# Altium PCB PCB1.PcbDoc (part 1 of 2)
Units mm, origin at the board's own origin, x right, y up, seen from the top; angles counter-clockwise.
Board outline 68.58 x 53.34 mm, 4 copper layers (Top Layer 1, GND Layer, GND Layer 2, Bottom Layer 2), stack 0.602 mm thick; 89 components, 77 nets, 453 pads, 4 vias.
Unrouted connection lines stored in the file: 288.
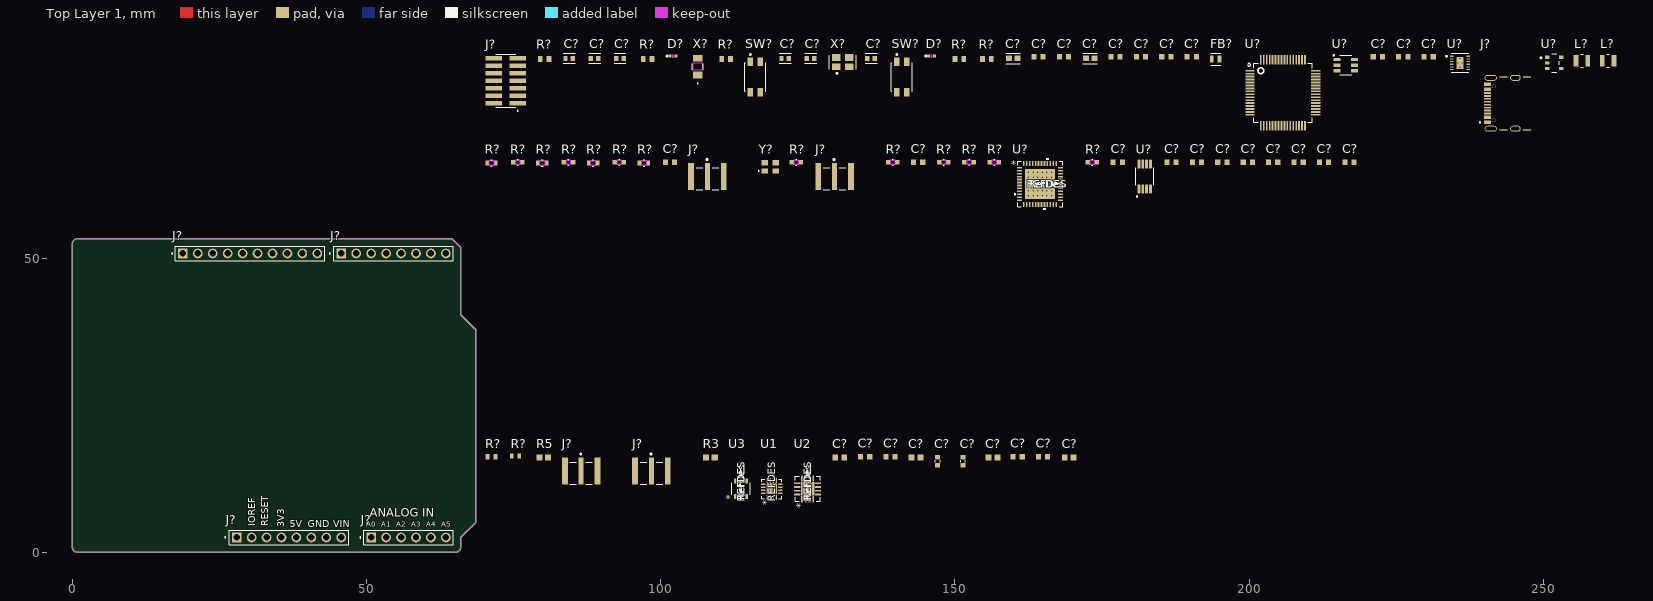
[diagram p0: Top Layer 1 view]
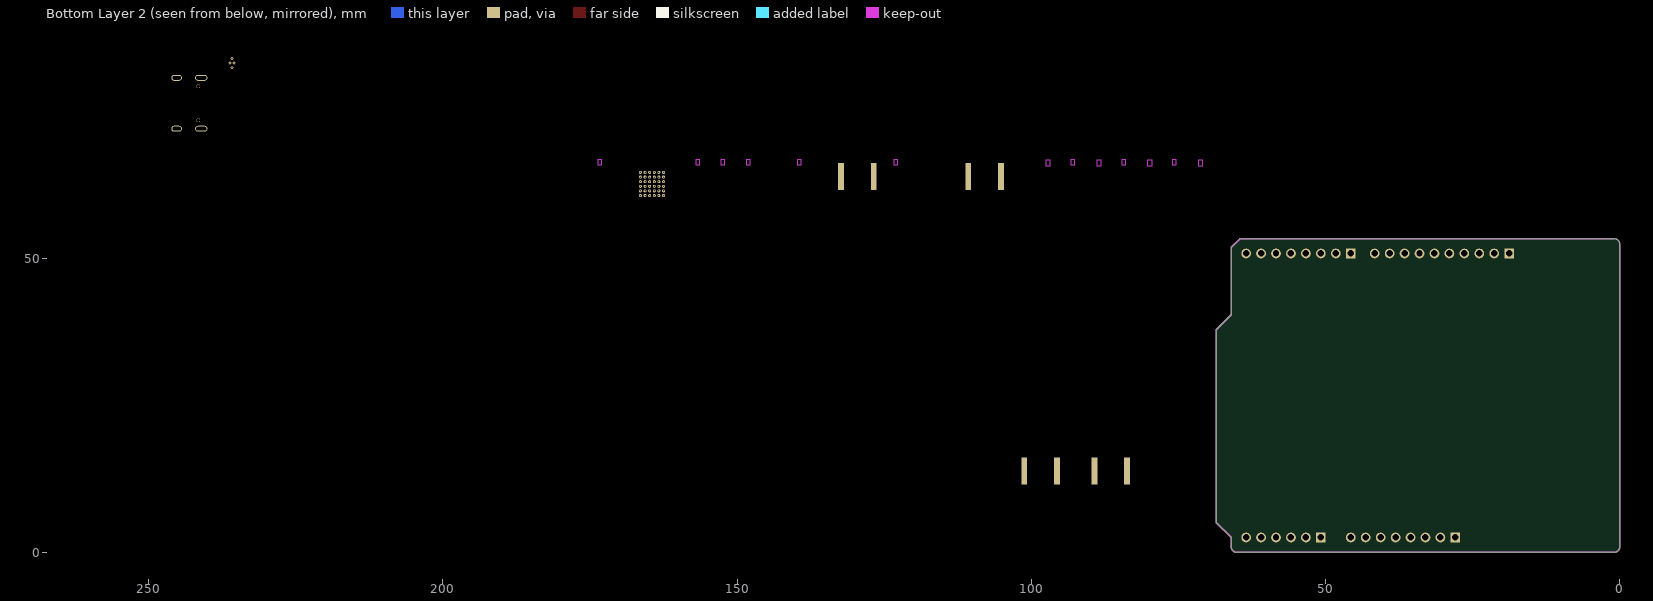
[diagram p1: Bottom Layer 2 view, seen from below]

## Layer stack, top to bottom
Top Solder: solder mask 0.0102, Solder Resist, Dk 3.5
Top Layer 1: signal copper 0.035
Dielectric 2: prepreg 0.0711, PP-006, Dk 4.1
GND Layer: signal copper 0.035
Dielectric 1: dielectric 0.32, FR-4, Dk 4.8
GND Layer 2: signal copper 0.035
Dielectric 3: prepreg 0.0711, PP-006, Dk 4.1
Bottom Layer 2: signal copper 0.035
Bottom Solder: solder mask 0.0102, Solder Resist, Dk 3.5

## Board outline
0,1 0,52.34 cw(c1,52.34) 1,53.34 64.516,53.34 66.04,51.816 66.04,40.386 68.58,37.846 68.58,5.08 66.04,2.54 66.04,1 cw(c65.04,1) 65.04,0 1,0 cw(c1,1)

## Design rules (kind name [scope] priority, off if disabled: settings)
Clearance [All] p1: gap=0.254 ignorepadtopadclearanceinfootprint=FALSE
DiffPairsRouting [All] p1: maxlimit=0.254 minlimit=0.254 mostfreqgap=0.254 toplayer_minwidth=0.381 toplayer_maxwidth=0.381 toplayer_prefwidth=0.381 midlayer1_minwidth=0.381 midlayer1_maxwidth=0.381 midlayer1_prefwidth=0.381 midlayer2_minwidth=0.381 midlayer2_maxwidth=0.381 midlayer2_prefwidth=0.381 bottomlayer_minwidth=0.381 bottomlayer_maxwidth=0.381 bottomlayer_prefwidth=0.381 maxuncoupledlength=12.7
PolygonConnect [All] p1: connectstyle=Relief reliefconductorwidth=0.254 reliefentries=4 polygonreliefangle="90 Angle" airgapwidth=0.254
RoutingVias [All] p1: holewidth=0.711 width=1.27 viastyle="Through Hole" minholewidth=0.711 minwidth=1.27 maxholewidth=0.711 maxwidth=1.27
SolderMaskExpansion [All] p1: expansion=0.102 istentingtop=FALSE
SupplyNets "Schematic Supply Nets_12" [InNet('V-')] p1: voltage=0.000
SupplyNets "Schematic Supply Nets_11" [InNet('V+')] p2: voltage=0.000
SupplyNets "Schematic Supply Nets_10" [InNet('VDD_MCU')] p3: voltage=0.000
SupplyNets "Schematic Supply Nets_9" [InNet('3V3')] p4: voltage=0.000
SupplyNets "Schematic Supply Nets_8" [InNet('VUSB_IN')] p5: voltage=0.000
SupplyNets "Schematic Supply Nets_7" [InNet('VCCI')] p6: voltage=0.000
SupplyNets "Schematic Supply Nets_6" [InNet('VUSB')] p7: voltage=0.000
SupplyNets "Schematic Supply Nets" [InNet('3.3V')] p8: voltage=0.000
SupplyNets "Schematic Supply Nets_5" [InNet('VPWR_PWM')] p9: voltage=0.000
SupplyNets "Schematic Supply Nets_4" [InNet('MODE')] p10: voltage=0.000
Width [All] p1: maxlimit=0.254 minlimit=0.254 preferedwidth=0.254
29 further rules are at their usual default settings.

## Classes and differential pairs
net class ADC_D[0..15]: ADC_D0 ADC_D1 ADC_D2 ADC_D3 ADC_D4 ADC_D5 ADC_D6 ADC_D7 ADC_D8 ADC_D9 ADC_D10 ADC_D11 ADC_D12 ADC_D13 ADC_D14 ADC_D15
component class "Power & MCU": C? D? F? FB? J? L? R? SW? U? X?
component class Connectors: J?
component class Heating: C? J? R? U? Y?
component class Conditioning: C? J? R3 R4 R5 R? U1 U2 U3
differential pair USB: +USB_P -USB_N
differential pair USB_D: +USB_D_P -USB_D_N

## Components (designator, comment, footprint, x,y, rotation, side; value= is the part's Value field where it differs from the comment)
C? "CL10B104KB8NNWC" ANTC1608X90N 101.6,66.294 r0 top value=100nF
C? "CL10B104KB8NNWC" ANTC1608X90N 217.043,66.294 r0 top value=100nF
C? "CL10B104KB8NNWC" ANTC1608X90N 191.135,66.294 r0 top value=100nF
C? "CL10B104KB8NNWC" ANTC1608X90N 134.747,16.256 r0 top value=100nF
C? "CL10B104KB8NNWC" ANTC1608X90N 204.089,66.294 r0 top value=100nF
C? "CL10B104KB8NNWC" ANTC1608X90N 212.725,66.294 r0 top value=100nF
C? "CL10B104KB8NNWC" ANTC1608X90N 195.453,66.294 r0 top value=100nF
C? "CL10B104KB8NNWC" ANTC1608X90N 143.764,66.294 r0 top value=100nF
C? "CL10B104KB8NNWC" ANTC1608X90N 208.407,66.294 r0 top value=100nF
C? "CL10B104KB8NNWC" ANTC1608X90N 177.673,66.294 r0 top value=100nF
C? "CL10B104KB8NNWC" ANTC1608X90N 186.817,66.294 r0 top value=100nF
C? "GRM188Z71A106KA73J" CAPC1608X100N 156.464,16.129 r0 top value=10uF
C? "CL10B104KB8NNWC" ANTC1608X90N 139.065,16.256 r0 top value=100nF
C? "CL10B104KB8NNWC" ANTC1608X90N 164.973,16.256 r0 top value=100nF
C? "CL10B102KB8NNNC" CAPC1608X90N 151.384,15.494 r0 top value=1nF
C? "GRM188Z71A106KA73J" CAPC1608X100N 143.383,16.129 r0 top value=10uF
C? "CL10B104KB8NNWC" ANTC1608X90N 160.655,16.256 r0 top value=100nF
C? "GRM188Z71A106KA73J" CAPC1608X100N 169.418,16.129 r0 top value=10uF
C? "CL10B102KB8NNNC" CAPC1608X90N 147.066,15.494 r0 top value=1nF
C? "GRM188Z71A106KA73J" CAPC1608X100N 130.429,16.129 r0 top value=10uF
C? "CL10B104KB8NNWC" ANTC1608X90N 168.529,84.201 r0 top value=100nF
C? "CL10A105KA8NNNC" ANTC1608X90N 230.505,84.201 r0 top value=1uF
C? "CL10B104KB8NNWC" ANTC1608X90N 185.928,84.201 r0 top value=100nF
C? "CL10B104KB8NNWC" ANTC1608X90N 181.61,84.201 r0 top value=100nF
C? "GCM1885C2A100JA16D" C0603-V2 121.158,83.947 r0 top value=10pF
C? "GCM1885C2A100JA16D" C0603-V2 125.476,83.947 r0 top value=10pF
C? "CL10B104KB8NNWC" ANTC1608X90N 177.292,84.201 r0 top value=100nF
C? "C0603C475K9PACTU" FP-C0603-CG-IPC_B 159.893,83.947 r0 top value=4.7uF
C? "0603N5R0B101CT" C0603-V2 84.455,83.947 r0 top value=5pF
C? "CL10B104KB8NNWC" ANTC1608X90N 221.869,84.201 r0 top value=100nF
C? "C0603C475K9PACTU" FP-C0603-CG-IPC_B 172.974,83.947 r0 top value=4.7uF
C? "0603N5R0B101CT" C0603-V2 88.773,83.947 r0 top value=5pF
C? "CL10B104KB8NNWC" ANTC1608X90N 199.771,66.294 r0 top value=100nF
C? "CL10E104KC8VPNC" C0603-V2 135.763,83.947 r0 top value=100nF
C? "CL10A105KA8NNNC" ANTC1608X90N 226.187,84.201 r0 top value=1uF
C? "CL10E104KC8VPNC" C0603-V2 93.091,83.947 r0 top value=100nF
C? "CL10B104KB8NNWC" ANTC1608X90N 190.246,84.201 r0 top value=100nF
C? "CL10A105KA8NNNC" ANTC1608X90N 164.211,84.201 r0 top value=1uF
D? "D5V0L1B2S9-7" SOD923_DIO 102.108,84.328 r0 top
D? "D5V0L1B2S9-7" SOD923_DIO 146.05,84.328 r0 top
FB? "BLM18SG700TN1D" BLM18SG700TN1D-MFG 194.31,83.82 r0 top
J? "10129378-908002BLF" AMPHENOL_10129378-908002BLF 54.61,50.8 r0 top
J? "10129378-910002BLF" AMPHENOL_10129378-910002BLF 30.226,50.8 r0 top
J? "10129378-908002BLF" AMPHENOL_10129378-908002BLF 36.83,2.54 r0 top
J? "EMPCB.SMAFSTJ.B.HT" "SMA Connector" 86.487,13.843 r0 top
J? "EMPCB.SMAFSTJ.B.HT" "SMA Connector" 98.425,13.843 r0 top
J? "FTSH-107-01-F-DV-K-P-TR" SAMTEC_FTSH-107-01-F-DV-K-P-TR 73.66,80.137 r90 top
J? "USB4105-GF-A" GCT_USB4105-GF-A 245.237,76.327 r90 top
J? "EMPCB.SMAFSTJ.B.HT" "SMA Connector" 107.95,63.881 r0 top
J? "54101-T06-06LF" AMPHENOL_54101-T06-06LF 57.15,2.54 r0 top
J? "EMPCB.SMAFSTJ.B.HT" "SMA Connector" 129.54,63.881 r0 top
L? "1239AS-H-4R7M=P2" FP-DFE252012C-MFG 260.985,83.566 r0 top
L? "1239AS-H-4R7M=P2" FP-DFE252012C-MFG 256.54,83.566 r0 top
R3 "RC0603FR-07100RL" RESC1607X60N 108.458,16.129 r0 top value=100
R5 "RC0603FR-07100RL" RESC1607X60N 80.137,16.129 r0 top value="100 Ohm"
R? "RC0603FR-071KL" RC0603N_YAG 156.718,66.294 r0 top value=1kR
R? "RC0605FR-07100RL" RC0603N_YAG 148.082,66.294 r0 top value=100R
R? "CRCW06033K00FKEA" RC0603N_YAG 92.964,66.294 r0 top value=3kR
R? "RC0603FR-071KL" RC0603N_YAG 152.4,66.294 r0 top value=1kR
R? "RC0603JR-070RL" RES_RC0603_YAG 97.155,66.167 r0 top value=0R
R? "RC0605FR-07100RL" RC0603N_YAG 139.446,66.294 r0 top value=100R
R? "CRCW06033K00FKEA" RC0603N_YAG 75.692,66.294 r0 top value=3kR
R? "RC0603FR-07383RL" RESC1608X55X25LL10T15 75.311,16.383 r0 top value=383
R? "RC0603JR-0720RL" RESC1608X55X25NL10T15 71.247,16.256 r0 top value=20
R? "RC0603JR-070RL" RES_RC0603_YAG 79.883,66.167 r0 top value=0R
R? "RC0605FR-07100RL" RC0603N_YAG 123.063,66.294 r0 top value=100R
R? "RC0603FR-071KL" RC0603N_YAG 173.355,66.294 r0 top value=1kR
R? "RT0603BRE075KL" R0603 155.448,83.82 r0 top value=5kR
R? "RC0603FR-07100KL" R0603 80.264,83.82 r0 top value=100kR
R? "RC0603FR-0710KL" R0603 111.125,83.82 r0 top value=10kR
R? "RC0603FR-0710KL" R0603 150.749,83.82 r0 top value=10kR
R? "RC0603JR-070RL" RES_RC0603_YAG 71.247,66.167 r0 top value=0R
R? "CRCW06032K00FKEAHP" RC0603N_YAG 84.328,66.294 r0 top value=2kR
R? "RC0603JR-070RL" RES_RC0603_YAG 88.519,66.167 r0 top value=0R
R? "RT0603BRE075KL" R0603 97.79,83.82 r0 top value=5kR
SW? "BOOT" FP-EVQ-P2402W-MFG 116.078,80.772 r90 top
SW? "RST" FP-EVQ-P2402W-MFG 140.97,80.772 r90 top
U1 "LTC6560HUDPBF" QFN16_UD_ADI 118.872,10.795 r90 top
U2 "AD8336ACPZ-RL" CP_16_4_ADI 124.968,10.795 r90 top
U3 "LT6233CS6-10#TRMPBF" TSOT-23_S6_LIT 113.665,10.795 r90 top
U? "ESDALCL6-2SC6" ESDALCL6-2SC6 216.408,82.804 r0 top
U? "ADS5560IRGZT" RGZ48_5P15X5P15 164.465,62.611 r0 top
U? "MCP6N16T-010E/MS" SOP65P490X110-8N 182.245,63.881 r90 top
U? "AP2112K-3.3TRG1" FP-SOT25-MFG 251.841,83.185 r0 top
U? "STM32F401RBT6" QFP50P1200X1200X160-64N 205.74,78.105 r0 top
U? "TPS65133DPDR" FP-DPD0012A-MFG 235.839,83.185 r0 top
X? "SC32S-7PF20PPM" XTAL_SC32S-7PF20PPM_EPS 106.299,82.55 r90 top value=32.768kHz
X? "TSX-3225 16.0000MF18X-AC0" FP-TSX-3225-MFG 130.937,83.312 r0 top value=16MHz
Y? "ECS-2033-400-BN" OSC_ECS-2033-400-BN 118.618,65.532 r0 top value=40MHz

## Footprints (in the part's own frame and the unit in brackets; to place one, negate y for a bottom-side part, rotate by r counter-clockwise, add the part's x,y. Pads: shape width x height; smd on the part's side, far side on the other; paste and mask are expansions set on the pad)
AMPHENOL_54101-T06-06LF [mm]
  rect 1.65x1.65 hole 1.1: A1(-6.35,0)
  round 1.65 hole 1.1: A2(-3.81,0) A3(-1.27,0) A4(1.27,0) A5(3.81,0) A6(6.35,0)
  silkscreen extent -8.27,-1.2 7.62,1.2, body extent -7.62,-1.2 7.62,1.2, height 8.39
AMPHENOL_10129378-908002BLF [mm]
  rect 1.65x1.65 / inner round 1.65 / far side rect 1.65x1.65 hole 1.1: 1(-8.89,0)
  round 1.65 hole 1.1: 2(-6.35,0) 3(-3.81,0) 4(-1.27,0) 5(1.27,0) 6(3.81,0) 7(6.35,0) 8(8.89,0)
  silkscreen extent -10.92,-1.22 10.16,1.19, body extent -2.49,-1.2 8.18,1.2, height 1.27
AMPHENOL_10129378-910002BLF [mm]
  rect 1.65x1.65 / inner round 1.65 / far side rect 1.65x1.65 hole 1.1: 1(-11.43,0)
  round 1.65 hole 1.1: 2(-8.89,0) 3(-6.35,0) 4(-3.81,0) 5(-1.27,0) 6(1.27,0) 7(3.81,0) 8(6.35,0) 9(8.89,0) 10(11.43,0)
  silkscreen extent -13.35,-1.2 12.7,1.2, body extent -2.49,-1.2 8.18,1.2, height 1.27
ANTC1608X90N [mm]
  rect 0.87x0.93 smd: 1(-0.78,0) 2(0.78,0)
  body extent -0.8,-0.4 0.8,0.4, height 0.45
BLM18SG700TN1D-MFG [mm]
  rect 0.65x1.2 smd paste-1000 mask-1000: 1(-0.675,0) 2(0.675,0)
  silkscreen extent -0.87,-1 0.87,1, body extent -1.1,-0.7 1.1,0.7, height 0.25
C0603-V2 [mm]
  rect 0.758x0.812 smd paste+0 mask+0: 1(-0.627,0) 2(0.627,0)
  silkscreen extent -1.01,-0.85 1.01,0.85, body extent -1.11,-0.55 1.11,0.55, height 0.25
CAPC1608X90N [mil] "Chip Resistor, Body 1.6x0.8mm, Height 0.9mm"
  rrect20% 34x30 smd: 1(0,28) 2(0,-28)
  silkscreen extent -16,-6 16,6, body extent -16,-30 16,30, height 36
CAPC1608X100N [mm]
  rect 1x1.02 smd: 1(-0.759,0) 2(0.759,0)
  body extent -0.8,-0.4 0.8,0.4, height 1
CP_16_4_ADI [mil]
  rect 42x12 smd paste+0 mask+0: 1(-69.5,38.39) 2(-69.5,12.8) 3(-69.5,-12.8) 4(-69.5,-38.39) 9(69.5,-38.39) 10(69.5,-12.8) 11(69.5,12.8) 12(69.5,38.39)
  rect 12x42 smd paste+0 mask+0: 5(-38.39,-69.5) 6(-12.8,-69.5) 7(12.8,-69.5) 8(38.39,-69.5) 13(38.39,69.5) 14(12.8,69.5) 15(-12.8,69.5) 16(-38.39,69.5)
  rect 89x89 smd paste+0 mask+0: 17(0,0)
  silkscreen extent -84,-84 110,84, body extent -79,-79 79,79, height 39
ESDALCL6-2SC6 [mil]
  rect 46.5x22 smd paste+0 mask+0: 1(-57.75,37.4) 2(-57.75,0) 3(-57.75,-37.4) 4(57.75,-37.4) 5(57.75,0) 6(57.75,37.4)
  silkscreen extent -84,-65 40,69, body extent -59,-60 59,60, height 57
FP-C0603-CG-IPC_B [mm]
  rect 1.007x0.958 smd paste+0 mask+0: 1(-0.726,0) 2(0.726,0)
  silkscreen extent -1.23,-0.88 1.23,0.88, body extent -1.48,-0.73 1.48,0.73, height 0.25
FP-DFE252012C-MFG [mm]
  rect 0.8x2 smd paste+0 mask+0: 1(-1,0) 2(1,0)
  silkscreen extent -0.23,-1.1 0.23,1.1, body extent -1.5,-1.2 1.5,1.2, height 0.25
FP-DPD0012A-MFG [mm]
  rrect100% 0.6x0.2 smd paste+0 mask+0: 1(-1.4,1.125) 2(-1.4,0.675) 3(-1.4,0.225) 4(-1.4,-0.225) 5(-1.4,-0.675) 6(-1.4,-1.125) 7(1.4,-1.125) 8(1.4,-0.675) 9(1.4,-0.225) 10(1.4,0.225) 11(1.4,0.675) 12(1.4,1.125)
  rect 1.21x2.02 smd paste-1000 mask+0: 13(0,0)
  silkscreen extent -2.4,-1.6 1.5,1.6, body extent -1.8,-1.65 1.8,1.65, height 0.25
FP-EVQ-P2402W-MFG [mm]
  rect 1.45x1 smd paste+0 mask+0: 1(2.575,0.85) 2(2.575,-0.85) 3(-2.575,0.85) 4(-2.575,-0.85)
  silkscreen extent -2.4,-1.8 3.97,1.8, body extent -3.4,-1.9 3.4,1.9, height 0.25
FP-SOT25-MFG [mm]
  rect 0.8x0.55 smd paste+0 mask+0: 1(-1.2,0.95) 2(-1.2,0) 3(-1.2,-0.95) 4(1.2,-0.95) 5(1.2,0.95)
  silkscreen extent -2.37,-1.55 0.85,1.55, body extent -1.7,-1.65 1.7,1.65, height 0.25
FP-TSX-3225-MFG [mm]
  rect 1.4x1.15 smd paste+0 mask+0: 1(-1.1,-0.8) 2(1.1,-0.8) 3(1.1,0.8) 4(-1.1,0.8)
  silkscreen extent -2.3,-2.02 2.3,1.2, body extent -1.9,-1.48 1.9,1.48, height 0.25
GCT_USB4105-GF-A [mm]
  rect 0.6x1.15 smd mask+0.05: A1_B12(-3.2,4.755) A4_B9(-2.4,4.755) B1_A12(3.2,4.755) B4_A9(2.4,4.755)
  rect 0.3x1.15 smd mask+0.05: A5(-1.25,4.755) A6(-0.25,4.755) A7(0.25,4.755) A8(1.25,4.755) B5(1.75,4.755) B6(0.75,4.755) B7(-0.75,4.755) B8(-1.75,4.755)
  oval 1x2.1 hole 0.6 slot 1.7 at 90 deg: SH1(-4.32,4.18) SH2(4.32,4.18)
  oval 1x1.8 hole 0.6 slot 1.4 at 90 deg: SH3(-4.32,0) SH4(4.32,0)
  round 0.65 hole 0.65 unplated: ""(-2.89,3.68) ""(2.89,3.68)
  silkscreen extent -4.47,-2.6 4.47,6.1, body extent -4.47,-2.6 4.47,5.11, height 3.31
OSC_ECS-2033-400-BN [mm]
  rect 1.1x0.9 smd: 1(-0.9,-0.7) 2(0.9,-0.7) 3(0.9,0.7) 4(-0.9,0.7)
  silkscreen extent -2.08,-0.8 -1.88,-0.6, body extent -1.25,-1 1.25,1, height 1
QFN16_UD_ADI [mil]
  rect 32x10 smd paste+0 mask+0: 1(-57,29.53) 2(-57,9.84) 3(-57,-9.84) 4(-57,-29.53) 9(57,-29.53) 10(57,-9.84) 11(57,9.84) 12(57,29.53)
  rect 10x32 smd paste+0 mask+0: 5(-29.53,-57) 6(-9.84,-57) 7(9.84,-57) 8(29.53,-57) 13(29.53,57) 14(9.84,57) 15(-9.84,57) 16(-29.53,57)
  rect 69x69 smd paste+0 mask+0: 17(0,0)
  silkscreen extent -66,-66 93,66, body extent -61,-61 61,61, height 32
QFP50P1200X1200X160-64N [mm]
  rect 1.6x0.3 smd: 1(-5.6,3.75) 2(-5.6,3.25) 3(-5.6,2.75) 4(-5.6,2.25) 5(-5.6,1.75) 6(-5.6,1.25) 7(-5.6,0.75) 8(-5.6,0.25) 9(-5.6,-0.25) 10(-5.6,-0.75) 11(-5.6,-1.25) 12(-5.6,-1.75) 13(-5.6,-2.25) 14(-5.6,-2.75) 15(-5.6,-3.25) 16(-5.6,-3.75) 33(5.6,-3.75) 34(5.6,-3.25) 35(5.6,-2.75) 36(5.6,-2.25) 37(5.6,-1.75) 38(5.6,-1.25) 39(5.6,-0.75) 40(5.6,-0.25) 41(5.6,0.25) 42(5.6,0.75) 43(5.6,1.25) 44(5.6,1.75) 45(5.6,2.25) 46(5.6,2.75) 47(5.6,3.25) 48(5.6,3.75)
  rect 0.3x1.6 smd: 17(-3.75,-5.6) 18(-3.25,-5.6) 19(-2.75,-5.6) 20(-2.25,-5.6) 21(-1.75,-5.6) 22(-1.25,-5.6) 23(-0.75,-5.6) 24(-0.25,-5.6) 25(0.25,-5.6) 26(0.75,-5.6) 27(1.25,-5.6) 28(1.75,-5.6) 29(2.25,-5.6) 30(2.75,-5.6) 31(3.25,-5.6) 32(3.75,-5.6) 49(3.75,5.6) 50(3.25,5.6) 51(2.75,5.6) 52(2.25,5.6) 53(1.75,5.6) 54(1.25,5.6) 55(0.75,5.6) 56(0.25,5.6) 57(-0.25,5.6) 58(-0.75,5.6) 59(-1.25,5.6) 60(-1.75,5.6) 61(-2.25,5.6) 62(-2.75,5.6) 63(-3.25,5.6) 64(-3.75,5.6)
  silkscreen extent -6,-5 5,5, body extent -6,-6 6,6, height 1.6
R0603 [mm] "Chip Resistor, 2-Leads, Body 1.60x0.80mm, IPC Low Density"
  rect 0.8x1 smd: 1(-0.75,0) 2(0.75,0)
  body extent -0.85,-0.45 0.85,0.45, height 0.55
RC0603N_YAG [mil]
  rect 30x32 smd paste+0 mask+0: 1(-30.5,0) 2(30.5,0)
  Top Layer 1 keep-out region: -13.5,-14 -13.5,14 13.5,14 13.5,-14
  Keep-Out Layer region: -13.5,-16 -13.5,16 13.5,16 13.5,-16
  silkscreen extent -3,-21 3,21, body extent -31,-16 31,16, height 28
RES_RC0603_YAG [mil]
  rect 24x35 smd paste+0 mask+0: 1(-29.5,0) 2(29.5,0)
  Top Layer 1 keep-out region: -15.5,-15.5 -15.5,15.5 15.5,15.5 15.5,-15.5
  Keep-Out Layer region: -15.5,-17.5 -15.5,17.5 15.5,17.5 15.5,-17.5
  silkscreen extent -5,-22 5,22, body extent -34,-17 34,17, height 22
RESC1607X60N [mm]
  rect 1.04x1.02 smd: 1(-0.735,0) 2(0.735,0)
RESC1608X55X25LL10T15 [mm] "Chip Resistor, 2-Leads, Body 1.60x0.80mm, IPC High Density"
  rect 0.6x0.8 smd: 1(-0.65,0) 2(0.65,0)
  body extent -0.85,-0.45 0.85,0.45, height 0.55
RESC1608X55X25NL10T15 [mm] "Chip Resistor, 2-Leads, Body 1.60x0.80mm, IPC Medium Density"
  rect 0.7x0.9 smd: 1(-0.7,0) 2(0.7,0)
  body extent -0.85,-0.45 0.85,0.45, height 0.55
RGZ48_5P15X5P15 [mil]
  rect 33.46x11.02 smd paste-5.51 mask-16.5: 1(-136.81,108.27) 2(-136.81,88.58) 3(-136.81,68.9) 4(-136.81,49.21) 5(-136.81,29.53) 6(-136.81,9.84) 7(-136.81,-9.84) 8(-136.81,-29.53) 9(-136.81,-49.21) 10(-136.81,-68.9) 11(-136.81,-88.58) 12(-136.81,-108.27) 25(136.81,-108.27) 26(136.81,-88.58) 27(136.81,-68.9) 28(136.81,-49.21) 29(136.81,-29.53) 30(136.81,-9.84) 31(136.81,9.84) 32(136.81,29.53) 33(136.81,49.21) 34(136.81,68.9) 35(136.81,88.58) 36(136.81,108.27)
  rect 11.02x33.46 smd paste-5.51 mask-16.5: 13(-108.3,-136.81) 14(-88.6,-136.81) 15(-68.92,-136.81) 16(-49.23,-136.81) 17(-29.53,-136.81) 18(-9.84,-136.81) 19(9.84,-136.81) 20(29.53,-136.81) 21(49.23,-136.81) 22(68.92,-136.81) 23(88.6,-136.81) 24(108.3,-136.81) 37(108.3,136.81) 38(88.6,136.81) 39(68.92,136.81) 40(49.23,136.81) 41(29.53,136.81) 42(9.84,136.81) 43(-9.84,136.81) 44(-29.53,136.81) 45(-49.23,136.81) 46(-68.92,136.81) 47(-88.6,136.81) 48(-108.3,136.81)
  rect 202.76x202.76 smd paste-100.88 mask-101: 49(0,0)
  round 20 / inner round 60 / far side round 20 hole 10 paste-99999 mask-10: V(-77.5,-77.5) V(-77.5,-46.5) V(-77.5,-15.5) V(-77.5,15.5) V(-77.5,46.5) V(-77.5,77.5) V(-46.5,-77.5) V(-46.5,-46.5) V(-46.5,-15.5) V(-46.5,15.5) V(-46.5,46.5) V(-46.5,77.5) V(-15.5,-77.5) V(-15.5,-46.5) V(-15.5,-15.5) V(-15.5,15.5) V(-15.5,46.5) V(-15.5,77.5) V(15.5,-77.5) V(15.5,-46.5) V(15.5,-15.5) V(15.5,15.5) V(15.5,46.5) V(15.5,77.5) V(46.5,-77.5) V(46.5,-46.5) V(46.5,-15.5) V(46.5,15.5) V(46.5,46.5) V(46.5,77.5) V(77.5,-77.5) V(77.5,-46.5) V(77.5,-15.5) V(77.5,15.5) V(77.5,46.5) V(77.5,77.5)
  silkscreen extent -174,-174 174,174, body extent -143,-143 143,143, height 55
SAMTEC_FTSH-107-01-F-DV-K-P-TR [mm]
  rect 0.74x2.79 smd: 1(-3.81,-2.035) 2(-3.81,2.035) 3(-2.54,-2.035) 4(-2.54,2.035) 5(-1.27,-2.035) 6(-1.27,2.035) 7(0,-2.035) 8(0,2.035) 9(1.27,-2.035) 10(1.27,2.035) 11(2.54,-2.035) 12(2.54,2.035) 13(3.81,-2.035) 14(3.81,2.035)
  silkscreen extent -5.19,-2.13 4.53,1.72, body extent -4.44,-3.69 4.44,3.67, height 6.98
"SMA Connector" [mm] "TAOGLAS_EMPCB.SMAFSTJ.B.HT"
  rect 0.85x4.56 smd: 1(0,0)
  rect 1x4.56 smd: SH1(-2.77,0) SH2(2.77,0)
  rect 1x4.56 smd far side: SH3(-2.77,0) SH4(2.77,0)
  silkscreen extent -1.9,-2.28 1.9,2.99, body extent -3.19,-11.4 3.19,1.9, height 3.55
SOD923_DIO [mm]
  rect 0.5x0.5 smd paste+0 mask+0: 1(-0.507,0) 2(0.507,0)
  Top Layer 1 keep-out region: -0.051,-0.249 -0.051,0.249 0.051,0.249 0.051,-0.249
  silkscreen extent -1.14,-0.13 -0.89,0.13, body extent -0.5,-0.3 0.5,0.3, height 0.82
SOP65P490X110-8N [mm]
  rrect50% 1.5x0.49 smd: 1(-2.105,0.975) 2(-2.105,0.325) 3(-2.105,-0.325) 4(-2.105,-0.975) 5(2.105,-0.975) 6(2.105,-0.325) 7(2.105,0.325) 8(2.105,0.975)
  silkscreen extent -3.5,-1.53 1.5,1.53, body extent -2.45,-1.5 2.45,1.5, height 1.1
TSOT-23_S6_LIT [mil]
  rect 34.5x20 smd paste+0 mask+0: 1(-51.75,37.4) 2(-51.75,0) 3(-51.75,-37.4) 4(51.75,-37.4) 5(51.75,0) 6(51.75,37.4)
  silkscreen extent -40,-62 40,62, body extent -55,-57 55,57, height 39
XTAL_SC32S-7PF20PPM_EPS [mil]
  rect 46x63 smd paste+0 mask+0: 1(-56,0) 2(56,0)
  Top Layer 1 keep-out region: -25,-29.5 -25,29.5 25,29.5 25,-29.5
  silkscreen extent -115,-36 21,36, body extent -65,-31 65,31, height 33

## Part data
C? C? C? C? C? C? C? C? C? C? C? C? C? C? C? C? C? C? C? C? C?: "CAP CER 0.1UF 50V X7R 0603", Case Code (Imperial)=0603, Case Code (Metric)=1608, Manufacturer=Samsung, Max Operating Temperature=125°C, Min Operating Temperature=-55°C, Package Quantity=1, Tolerance=10%, Voltage Rating=50V, Case/Package=0603, Category="Ceramic Capacitors", ComponentLink1Description=https://datasheet.ciiva.com/25740/cl10b104kb8nnwc-25740227.pdf?src-supplier=Digikey, ComponentLink1URL=https://datasheet.ciiva.com/25740/cl10b104kb8nnwc-25740227.pdf?src-supplier=Digikey, Length=0.063inch, Manufacturer Part Number=CL10B104KB8NNWC, Mounting Technology="Surface Mount", Packaging="Cut Tape", Pricing="4000=0.0024 (USD)", RoHS=Yes, RoHS Compliant=Yes, Series=CL, Stock=4312000, Supplier="Arrow Electronics", Supplier Part Number=CL10B104KB8NNWC, Thickness=0.035inch, Width=0.031inch
C? C? C? C?: "CAP CER 10UF 10V X7R 0603", Capacitor Type=Ceramic, Case/Package=0603, Manufacturer=Murata, Max Operating Temperature=125°C, Min Operating Temperature=-55°C, Package Shape=Rectangular, Rated DC Voltage (URdc)=10V, Supplier Part Number=81-GRM188Z71A106KA3J, Temperature Characteristics Code=X7R, Tolerance  (fill in as +-)=10%, Category="Ceramic Capacitors", ComponentLink1Description=https://psearch.en.murata.com:443/capacitor/product/GRM188Z71A106KA73%23.pdf?src-supplier=IHS+Markit, ComponentLink1URL=https://psearch.en.murata.com:443/capacitor/product/GRM188Z71A106KA73%23.pdf?src-supplier=IHS+Markit, Dielectric Material=Ceramic, Manufacturer Part Number=GRM188Z71A106KA73J, Mounting Technology="Surface Mount", Multilayer=Yes, Packaging="Tape and Reel", Pins=2, Pricing="1=0.23, 10=0.121, 50=0.121, 100=0.073, 1000=0.056, 10000=0.041 (USD)", Reach SVHC Compliant=Yes, RoHS=Yes, RoHS Compliant=Yes, Stock=19133, Supplier=Mouser, Termination=Wraparound, Tolerance (fill in as +-)=10%
C? C?: "CAP CER 1000PF 50V X7R 0603", Case Code (Imperial)=0603, Case Code (Metric)=1608, Dielectric=X7R, Manufacturer=Samsung, Max Operating Temperature=125°C, Min Operating Temperature=-55°C, Package Quantity=1, Tolerance=10%, Voltage=50V, Case/Package=0603, Category="Ceramic Capacitors", ComponentLink1Description=https://datasheet.ciiva.com/25805/cl10b102kb8nnnc-25805137.pdf?src-supplier=Digikey, ComponentLink1URL=https://datasheet.ciiva.com/25805/cl10b102kb8nnnc-25805137.pdf?src-supplier=Digikey, ComponentLink2Description=https://datasheet.ciiva.com/15216/getdatasheetpartid-359690-15216231.pdf?src-supplier=Verical, ComponentLink2URL=https://datasheet.ciiva.com/15216/getdatasheetpartid-359690-15216231.pdf?src-supplier=Verical, ComponentLink3Description=https://datasheet.ciiva.com/29198/458300-da-01-en-vs-kondensator-0603-29198498.pdf?src-supplier=Conrad, ComponentLink3URL=https://datasheet.ciiva.com/29198/458300-da-01-en-vs-kondensator-0603-29198498.pdf?src-supplier=Conrad, ComponentLink4Description=https://datasheet.ciiva.com/26310/mlcc-catalogdownload2013-eng-26310326.pdf?src-supplier=Distrelec, ComponentLink4URL=https://datasheet.ciiva.com/26310/mlcc-catalogdownload2013-eng-26310326.pdf?src-supplier=Distrelec, ComponentLink5Description=https://datasheet.ciiva.com/16199/cl05b104kq5nnnc-16199064.pdf?src-supplier=Future+Electronics, ComponentLink5URL=https://datasheet.ciiva.com/16199/cl05b104kq5nnnc-16199064.pdf?src-supplier=Future+Electronics, Construction=Flat, Depth=0.8mm, Height=0.8mm, Lead Free="Lead Free", Length=1.6mm, Manufacturer Part Number=CL10B102KB8NNNC, Material=Ceramic, Mounting Technology="Surface Mount", Packaging="Tape and Reel", Pricing="4000=0.006, 8000=0.004, 28000=0.0039, 100000=0.0035 (USD)", Radiation Hardening=No, RoHS=Yes, RoHS Compliant=Yes, Series=CL, Stock=8676000, Supplier="Arrow Electronics", Supplier Part Number=CL10B102KB8NNNC, Thickness=0.035inch, Voltage Rating=50V, Voltage Rating (DC)=50V, Width=0.031inch
C? C? C?: "CAP CER 1UF 25V X5R 0603", Capacitor Type=Ceramic, Case/Package=0603, Manufacturer=Samsung, Max Operating Temperature=85°C, Min Operating Temperature=-55°C, Package Shape=Rectangular, Package Style=SMTMeter, Rated DC Voltage (URdc)=25V, Temperature Characteristics Code=X5R, Tolerance  (fill in as +-)=10%, Category="Ceramic Capacitors", ComponentLink1Description=https://datasheet.ciiva.com:443/pdfs/VipMasterIC/IC/SEMS/SEMS-S-A0008520814/SEMS-S-A0008520762-1.pdf?src-supplier=IHS+Markit, ComponentLink1URL=https://datasheet.ciiva.com:443/pdfs/VipMasterIC/IC/SEMS/SEMS-S-A0008520814/SEMS-S-A0008520762-1.pdf?src-supplier=IHS+Markit, ComponentLink2Description=https://datasheet.ciiva.com/25801/cl10a105ka8nnnc-25801364.pdf?src-supplier=Digikey, ComponentLink2URL=https://datasheet.ciiva.com/25801/cl10a105ka8nnnc-25801364.pdf?src-supplier=Digikey, ComponentLink3Description=https://datasheet.ciiva.com/26838/getdatasheetpartid-357530-26838332.pdf?src-supplier=Verical, ComponentLink3URL=https://datasheet.ciiva.com/26838/getdatasheetpartid-357530-26838332.pdf?src-supplier=Verical, ComponentLink4Description=https://datasheet.ciiva.com/29198/458162-da-01-en-vs-kondensator-0603-29198475.pdf?src-supplier=Conrad, ComponentLink4URL=https://datasheet.ciiva.com/29198/458162-da-01-en-vs-kondensator-0603-29198475.pdf?src-supplier=Conrad, Dielectric Material=Ceramic, Height=0.9mm, JESD-609 Code=e3, Length=1.6mm, Manufacturer Part Number=CL10A105KA8NNNC, Mounting Technology="Surface Mount", Multilayer=Yes, Packaging="Tape and Reel", Pins=2, Pricing="4000=0.0054, 8000=0.0044, 28000=0.0037, 100000=0.0034, 200000=0.0032 (USD)", Reach SVHC Compliant=Yes, RoHS=Yes, RoHS Compliant=Yes, Stock=444000, Supplier="Arrow Electronics", Supplier Part Number=CL10A105KA8NNNC, Terminal Finish=Nickel, Termination=Wraparound, Tolerance (fill in as +-)=10%, Width=0.8mm
C? C?: "CAP CER 10PF 100V C0G/NP0 0603", Capacitor Type=Ceramic, Case/Package=0603, Manufacturer=Murata, Max Operating Temperature=125°C, Min Operating Temperature=-55°C, Package Shape=Rectangular, Package Style=SMTMeter, Rated DC Voltage (URdc)=100V, Supplier Part Number=81-GCM1885C2A100JA6D, Temperature Characteristics Code=C0G, Tolerance  (fill in as +-)=5%, Category="Ceramic Capacitors", ComponentLink1Description=https://datasheet.ciiva.com:443/pdfs/VipMasterIC/IC/MURE/MURE-S-A0004365318/MURE-S-A0004370306-1.pdf?src-supplier=IHS+Markit, ComponentLink1URL=https://datasheet.ciiva.com:443/pdfs/VipMasterIC/IC/MURE/MURE-S-A0004365318/MURE-S-A0004370306-1.pdf?src-supplier=IHS+Markit, ComponentLink2Description=https://datasheet.ciiva.com/133/product-133480.pdf?src-supplier=Digikey, ComponentLink2URL=https://datasheet.ciiva.com/133/product-133480.pdf?src-supplier=Digikey, ComponentLink3Description=https://datasheet.ciiva.com/133/product-133481.pdf?src-supplier=Digikey, ComponentLink3URL=https://datasheet.ciiva.com/133/product-133481.pdf?src-supplier=Digikey, ComponentLink4Description=https://datasheet.ciiva.com/133/product-133482.pdf?src-supplier=Digikey, ComponentLink4URL=https://datasheet.ciiva.com/133/product-133482.pdf?src-supplier=Digikey, ComponentLink5Description=https://datasheet.ciiva.com/18183/getdatasheetpartid-307287-18183583.pdf?src-supplier=Verical, ComponentLink5URL=https://datasheet.ciiva.com/18183/getdatasheetpartid-307287-18183583.pdf?src-supplier=Verical, ComponentLink6Description=https://datasheet.ciiva.com/11607/product-11607353.pdf?src-supplier=Avnet, ComponentLink6URL=https://datasheet.ciiva.com/11607/product-11607353.pdf?src-supplier=Avnet, Dielectric Material=Ceramic, Height=0.9mm, JESD-609 Code=e3, Length=1.6mm, Manufacturer Part Number=GCM1885C2A100JA16D, Mounting Technology="Surface Mount", Multilayer=Yes, Packaging="Tape and Reel", Pins=2, Pricing="1=0.1, 10=0.028, 50=0.028, 100=0.019, 1000=0.017, 10000=0.011 (USD)", Reach SVHC Compliant=Yes, Reference Standard=AEC-Q200, RoHS=Yes, RoHS Compliant=Yes, Stock=25975, Supplier=Mouser, Terminal Finish=Nickel, Termination=Wraparound, Tolerance (fill in as +-)=5%, Width=0.8mm
C? C?: library part CMP-2006-02256-2, "CAP CER 4.7UF 6.3V X5R 0603", Capacitance=4.7uF, Manufacturer=Kemet, Package=0603, Temperature="-55°C to +85°C", Temperature Characteristic=X5R, Temperature Coefficient=15%, Temperature Range High=+85°C, Temperature Range Low=-55°C, Tolerance=10%, Voltage Rating=6.3V, Automotive=No, Category=Cap, ComponentLink2Description=Datasheet, ComponentLink2URL=https://content.kemet.com/datasheets/KEM_C1006_X5R_SMD.pdf, Device Class L1="Passive Components", Device Class L2=Capacitors, Device Class L3="Ceramic Capacitors", Digikey Description="CAP CER 4.7UF 6.3V X5R 0603", Height=0.9mm, Ipc Land Pattern Name=CAPC16080X80, Lead Free=Yes, Manufacturer Part Number=C0603C475K9PACTU, Material=Ceramic, Mouser Description="Multilayer Ceramic Capacitors MLCC - SMD/SMT 6.3volts 4.7uF X5R 10%", Octopart=https://octopart.com/c0603c475k9pactu-kemet-104242, RoHS=TRUE
C? C?: "CAP CER 5PF 100V C0G/NP0 0603", Case=0603, Manufacturer="Walsin Technologies", Supplier Part Number=1292-1649-1-ND, Category="Ceramic Capacitors", ComponentLink1Description=http://www.passivecomponent.com/wp-content/uploads/2018/10/MLCC.pdf?src-supplier=Digikey, ComponentLink1URL=http://www.passivecomponent.com/wp-content/uploads/2018/10/MLCC.pdf?src-supplier=Digikey, Manufacturer Part Number=0603N5R0B101CT, Pricing="1=0.1, 10=0.067, 50=0.0402, 100=0.0316, 500=0.02332, 1000=0.01931 (USD)", RoHS=Yes, Stock=11864, Supplier=Digikey
C? C?: "CAP CER 100NF 100V X8L 0603", Case=0603, Manufacturer=Samsung, Supplier Part Number=1276-CL10E104KC8VPNCCT-ND, Manufacturer Part Number=CL10E104KC8VPNC, Pricing="1=0.27, 10=0.155, 50=0.1104, 100=0.0966, 500=0.07306, 1000=0.06573 (USD)", RoHS=No, Stock=47712, Supplier=Digikey
D? D?: "TVS DIODE 5VWM 14VC SOD923", Manufacturer=Diodes, Max Breakdown Voltage=8V, Max Operating Temperature=150°C, Max Power Dissipation=250mW, Mfr_Name="Diodes Inc", Min Breakdown Voltage=6V, Min Operating Temperature=-65°C, Non-rep Peak Rev Power Dis-Max=84W, Package Body Material=Plastic, Package Shape=Rectangular, Package Style="SMALL OUTLINEMeter", Rep Pk Reverse Voltage-Max=5V, Supplier Part Number=D5V0L1B2S9-7DICT-ND, Category="TVS Diodes", ComponentLink1Description=https://datasheet.ciiva.com:443/pdfs/VipMasterIC/IC/DIOD/DIOD-S-A0001248739/DIOD-S-A0001248739-1.pdf?src-supplier=IHS+Markit, ComponentLink1URL=https://datasheet.ciiva.com:443/pdfs/VipMasterIC/IC/DIOD/DIOD-S-A0001248739/DIOD-S-A0001248739-1.pdf?src-supplier=IHS+Markit, ComponentLink2Description=https://datasheet.ciiva.com/48480/d5v0l1b2s9-48480055.pdf?src-supplier=Avnet, ComponentLink2URL=https://datasheet.ciiva.com/48480/d5v0l1b2s9-48480055.pdf?src-supplier=Avnet, Diode Element Material=SILICON, Diode Type="TRANS VOLTAGE SUPPRESSOR", JESD-30 Code=R-PDSO-F2, JESD-609 Code=e3, Manufacturer Part Number=D5V0L1B2S9-7, Moisture Sensitivity Level=1, Number of Elements=1, Pins=2, Polarity=Bidirectional, Pricing="1=0.16, 10=0.109, 100=0.048, 500=0.043, 1000=0.038, 2000=0.037, 5000=0.036 (USD)", Reach SVHC Compliant=Yes, RoHS=Yes, RoHS Compliant=Yes, Stock=757815, Supplier=Digikey, Surface Mount=Yes, Technology=AVALANCHE, Terminal Finish=Tin, Terminal Form=Flat, Terminal Position=DUAL
FB?: "FERRITE BEAD 70 OHM 0603 1LN", Case Code=0603, Case Code (Metric)=1608, Clock Frequency=100MHz, Current Rating=4A, DC Resistance (DCR)=20mR, Manufacturer=Murata, Max Operating Temperature=125°C, Min Operating Temperature=-55°C, Package Quantity=1, Supplier Part Number=81-BLM18SG700TN1D, Tolerance=25%, Case Code (Imperial)=0603, Case/Package=0603, Category="Ferrite Beads and Chips", Channels=1, ComponentLink1Description=https://datasheet.ciiva.com:443/pdfs/VipMasterIC/IC/MURE/MURE-S-A0008515766/MURE-S-A0008515869-1.pdf?src-supplier=IHS+Markit, ComponentLink1URL=https://datasheet.ciiva.com:443/pdfs/VipMasterIC/IC/MURE/MURE-S-A0008515766/MURE-S-A0008515869-1.pdf?src-supplier=IHS+Markit, ComponentLink2Description=https://datasheet.ciiva.com/8021/5151-8021529.pdf?src-supplier=Element14, ComponentLink2URL=https://datasheet.ciiva.com/8021/5151-8021529.pdf?src-supplier=Element14, ComponentLink3Description=https://datasheet.ciiva.com/8021/5151-8021530.pdf?src-supplier=Element14, ComponentLink3URL=https://datasheet.ciiva.com/8021/5151-8021530.pdf?src-supplier=Element14, ComponentLink4Description=https://datasheet.ciiva.com/14122/blm-series-eng-tds-14122901.pdf?src-supplier=Distrelec, ComponentLink4URL=https://datasheet.ciiva.com/14122/blm-series-eng-tds-14122901.pdf?src-supplier=Distrelec, ComponentLink5Description=https://datasheet.ciiva.com/6212/l0110s0100blm18s-6212357.pdf?src-supplier=Digikey, ComponentLink5URL=https://datasheet.ciiva.com/6212/l0110s0100blm18s-6212357.pdf?src-supplier=Digikey, ComponentLink6Description=https://datasheet.ciiva.com/6212/l0110s0100blm18s-6212359.pdf?src-supplier=Digikey, ComponentLink6URL=https://datasheet.ciiva.com/6212/l0110s0100blm18s-6212359.pdf?src-supplier=Digikey, ComponentLink7Description=https://datasheet.ciiva.com/16420/l0110s0100blm18s-16420729.pdf?src-supplier=Future+Electronics, ComponentLink7URL=https://datasheet.ciiva.com/16420/l0110s0100blm18s-16420729.pdf?src-supplier=Future+Electronics, Construction="Chip Bead", Core Material=Ferrite, DC Resistance-Max=20mR, Depth=0.8mm, Filter Type="FERRITE CHIP", Height=0.8mm, Impedance=70R, JESD-609 Code=e3, Lead Free="Lead Free", Length=1.6mm, Manufacturer Part Number=BLM18SG700TN1D, Material=Steel, Max Current Rating=4A, Max DC Current=4A, Min Frequency=100MHz, Mounting Technology="Surface Mount", Number of Circuits=1, Number of Lines=1, Number of Pins=2, Output Impedance=70R, Packaging="Tape and Reel", Pricing="1=0.14, 10=0.071, 50=0.071, 100=0.049, 1000=0.041, 10000=0.03 (USD)", REACH SVHC="No SVHC", Reach SVHC Compliant=Yes, RoHS=Yes, RoHS Compliant=Yes, Series=BLM18S, Stock=139676, Supplier=Mouser, Terminal Finish=Tin, Termination=SMD/SMT, Test Frequency=100MHz, Width=0.8mm
J? J?: "EconoStik&trade; 2.54mm, Board to Board Connector, Unshrouded Verticl Header, Through Hole, Single Row, 8 Positions, 2.54 mm (0.100in) Pitch.", Package=None, Check_prices=https://www.snapeda.com/parts/10129378-908002BLF/Amphenol/view-part/?ref=eda, MF=Amphenol, MP=10129378-908002BLF, SnapEDA_Link=https://www.snapeda.com/parts/10129378-908002BLF/Amphenol/view-part/?ref=snap
J?: Package=None, Availability=Unavailable, MP=10129378-910002BLF, Price=None
J? J? J? J?: library part "SMA Connector", "SMA Connector Jack, Female Socket 50Ohm Board Edge, End Launch Solder", Package=None, Availability="In Stock", Check_prices=https://www.snapeda.com/parts/EMPCB.SMAFSTJ.B.HT/Taoglas+Limited/view-part/?ref=eda, MF="Taoglas Limited", MP=EMPCB.SMAFSTJ.B.HT, Price=None, Purchase-URL=https://pricing.snapeda.com/search/part/EMPCB.SMAFSTJ.B.HT/?ref=eda, SnapEDA_Link=https://www.snapeda.com/parts/EMPCB.SMAFSTJ.B.HT/Taoglas+Limited/view-part/?ref=snap
J?: "CONN HEADER SMD 14POS 1.27MM", Manufacturer=Samtec, Body Breadth=0.135inch, Body Length=0.35inch, Category="Headers and Wire Housings", ComponentLink1Description=https://datasheet.ciiva.com:443/pdfs/VipMasterIC/IC/SAMI/SAMI-S-A0002896813/SAMI-S-A0002896813-1.pdf?src-supplier=IHS+Markit, ComponentLink1URL=https://datasheet.ciiva.com:443/pdfs/VipMasterIC/IC/SAMI/SAMI-S-A0002896813/SAMI-S-A0002896813-1.pdf?src-supplier=IHS+Markit, ComponentLink2Description=https://datasheet.ciiva.com/10037/ftsh-mt-10037030.pdf?src-supplier=Avnet, ComponentLink2URL=https://datasheet.ciiva.com/10037/ftsh-mt-10037030.pdf?src-supplier=Avnet, Connector Type="BOARD CONNECTOR", Contact Finish - Mating="AU ON NI", Contact Finish - Termination="Tin (Sn) - with Nickel (Ni) barrier", Contact Gender=Male, Contact Material=Bronze, Contact Pattern=RECTANGULAR, Contact Style="SQ PIN-SKT", Insulation Material=Polymer, JESD-609 Code=e3, Manufacturer Part Number=FTSH-107-01-F-DV-K-P-TR, Mating Contact Pitch=0.05inch, Mating Contact Row Spacing=0.05inch, Mounting Option 1=LOCKING, Mounting Style=STRAIGHT, Mounting Technology=Board, Number Of Connectors=1, Number of Contacts=14, Number Of PCB Rows=2, Number of Rows Loaded=2, PCB Contact Pattern=RECTANGULAR, PCB Contact Row Spacing=4.064mm, Plating Thickness=3uin, Pricing="400=2.37529, 800=2.0349, 1600=1.7286, 2400=1.6884, 3200=1.4396 (USD)", Reach SVHC Compliant=Yes, Reference Standard=UL, Reliability=COMMERCIAL, RoHS=Yes, RoHS Compliant=Yes, Stock=1872, Supplier=Avnet, Supplier Part Number=FTSH-107-01-F-DV-K-P-TR, Terminal Pitch=1.27mm, Termination=SMD/SMT
J?: "CONN RCP USB2.0 TYP C 24P SMD RA", Manufacturer="Global Connector Technology", Supplier Part Number=71AJ9393, Category="USB Connectors", ComponentLink1Description=https://gct.co/files/drawings/usb4105.pdf?src-supplier=Digikey, ComponentLink1URL=https://gct.co/files/drawings/usb4105.pdf?src-supplier=Digikey, Manufacturer Part Number=USB4105-GF-A, RoHS=No, Supplier=Newark
J?: "BergStikÂ®, Board to Board connector, Unshrouded vertical Header, Through Hole, Single Row, 6 Positions, 2.54 mm Pitch.", Package=None, Availability="In Stock", Check_prices=https://www.snapeda.com/parts/54101-T06-06LF/Amphenol+FCI/view-part/?ref=eda, MF="Amphenol ICC (FCI)", MP=54101-T06-06LF, Price=None, Purchase-URL=https://pricing.snapeda.com/search/part/54101-T06-06LF/?ref=eda, SnapEDA_Link=https://www.snapeda.com/parts/54101-T06-06LF/Amphenol+FCI/view-part/?ref=snap
L? L?: "Shielded Wirewound Inductor 4.7uH 20% 1300mA 0.24Ω 1008 (2520)", Case Code (Imperial)=1008, Case Code (Metric)=2520, Current Rating=1.5A, DC Resistance (DCR)=240mR, Inductance=4.7uH, Max Operating Temperature=85°C, Min Operating Temperature=-40°C, Resistor Type=Wirewound, Test Frequency=1MHz, Tolerance=20%, Case/Package=1008, Core Material=Ferrite, Height - Seated (Max)=0.047inch, Length=0.098inch, Mount="Surface Mount", Packaging="Tape and Reel", Shielding=Shielded, Width=0.079inch
R3 R5: "RES SMT 100R 1% 0603 T/R PICK#92931", Package=None, Availability=Unavailable, MP=RC0603FR-07100RL, Price=None
R? R? R?: "Fixed Resistor, Metal Glaze/thick Film, 0.1W, 1000ohm, 75V, 1% +/-Tol, 100ppm/Cel, Surface Mount, 0603", Case/Package=0603, Manufacturer=Yageo, Max Operating Temperature=155°C, Min Operating Temperature=-55°C, Package Height=0.45mm, Package Length=1.6mm, Package Shape=Rectangular, Package Width=0.8mm, Power=100mW, Rated Temperature=70°C, Resistor Type="FIXED RESISTOR", Temperature Coefficient (ppm/Cel)=100, Tolerance=1%, Working Voltage=75V, Additional Feature="LASER TRIMMABLE", Category="Chip SMD Resistors", ComponentLink1Description=https://datasheet.ciiva.com:443/pdfs/VipMasterIC/IC/YAGO/YAGO-S-A0008145938/YAGO-S-A0008145938-1.pdf?src-supplier=IHS+Markit, ComponentLink1URL=https://datasheet.ciiva.com:443/pdfs/VipMasterIC/IC/YAGO/YAGO-S-A0008145938/YAGO-S-A0008145938-1.pdf?src-supplier=IHS+Markit, ComponentLink2Description=https://datasheet.ciiva.com/11808/0900766b80f96399-11808081.pdf?src-supplier=Rs, ComponentLink2URL=https://datasheet.ciiva.com/11808/0900766b80f96399-11808081.pdf?src-supplier=Rs, ComponentLink3Description=https://datasheet.ciiva.com/7660/1868787-7660790.pdf?src-supplier=Element14, ComponentLink3URL=https://datasheet.ciiva.com/7660/1868787-7660790.pdf?src-supplier=Element14, ComponentLink4Description=https://datasheet.ciiva.com/7746/1738695-7746279.pdf?src-supplier=Element14, ComponentLink4URL=https://datasheet.ciiva.com/7746/1738695-7746279.pdf?src-supplier=Element14, ComponentLink5Description=https://datasheet.ciiva.com/7746/1686128-7746280.pdf?src-supplier=Element14, ComponentLink5URL=https://datasheet.ciiva.com/7746/1686128-7746280.pdf?src-supplier=Element14, ComponentLink6Description=https://datasheet.ciiva.com/7746/1738695-7746281.pdf?src-supplier=Element14, ComponentLink6URL=https://datasheet.ciiva.com/7746/1738695-7746281.pdf?src-supplier=Element14, ComponentLink7Description=https://datasheet.ciiva.com/7983/443971-7983613.pdf?src-supplier=Element14, ComponentLink7URL=https://datasheet.ciiva.com/7983/443971-7983613.pdf?src-supplier=Element14, ComponentLink8Description=https://datasheet.ciiva.com/15189/getdatasheetpartid-404327-15189644.pdf?src-supplier=Verical, ComponentLink8URL=https://datasheet.ciiva.com/15189/getdatasheetpartid-404327-15189644.pdf?src-supplier=Verical, ComponentLink9Description=https://datasheet.ciiva.com/8896/pyu-rc0603-51-rohs-l-4-8896106.pdf?src-supplier=Avnet, ComponentLink9URL=https://datasheet.ciiva.com/8896/pyu-rc0603-51-rohs-l-4-8896106.pdf?src-supplier=Avnet, Construction=Chip, JESD-609 Code=e3, Manufacturer Part Number=RC0603FR-071KL, Mounting Technology="Surface Mount", Packaging="Tape and Reel", Pins=2, Pricing="5000=0.00146, 10000=0.00141, 20000=0.00136, 30000=0.00131, 40000=0.00127 (USD)", Reach SVHC Compliant=Yes, RoHS=Yes, RoHS Compliant=Yes, Stock=765000, Supplier=Avnet, Supplier Part Number=RC0603FR-071KL, Technology="METAL GLAZE/THICK FILM", Terminal Finish=Nickel, Termination=Wraparound
R? R? R?: "Fixed Resistor, Metal Glaze/thick Film, 0.1W, 100ohm, 75V, 1% +/-Tol, 100ppm/Cel, Surface Mount, 0603", Case/Package=0603, Manufacturer=Yageo, Manufacturer Part Number=RC0603FR-07100RL, Max Operating Temperature=155°C, Min Operating Temperature=-55°C, Package Height=0.45mm, Package Length=1.6mm, Package Shape=Rectangular, Package Width=0.8mm, Power=100mW, Rated Temperature=70°C, Resistor Type="FIXED RESISTOR", Temperature Coefficient (ppm/Cel)=100, Tolerance=1%, Working Voltage=75V, Additional Feature="LASER TRIMMABLE", Category="Chip SMD Resistors", ComponentLink1Description=https://datasheet.ciiva.com:443/pdfs/VipMasterIC/IC/YAGO/YAGO-S-A0008145938/YAGO-S-A0008145938-1.pdf?src-supplier=IHS+Markit, ComponentLink1URL=https://datasheet.ciiva.com:443/pdfs/VipMasterIC/IC/YAGO/YAGO-S-A0008145938/YAGO-S-A0008145938-1.pdf?src-supplier=IHS+Markit, Construction=Chip, JESD-609 Code=e3, Mounting Technology="Surface Mount", Packaging="Tape and Reel", Pins=2, Pricing="5000=0.00146, 10000=0.00141, 20000=0.00136, 30000=0.00131, 40000=0.00127 (USD)", Reach SVHC Compliant=Yes, RoHS=Yes, RoHS Compliant=Yes, Stock=2650000, Supplier=Avnet, Supplier Part Number=RC0603FR-07100RL, Technology="METAL GLAZE/THICK FILM", Terminal Finish=Nickel, Termination=Wraparound
R? R?: "RES SMD 3K OHM 1% 1/10W 0603", Case/Package=0603, Manufacturer=Vishay, Max Operating Temperature=155°C, Min Operating Temperature=-55°C, Package Height=0.45mm, Package Length=1.55mm, Package Shape=Rectangular, Package Width=0.85mm, Power=100mW, Rated Temperature=70°C, Resistor Type="FIXED RESISTOR", Temperature Coefficient (ppm/Cel)=100, Tolerance=1%, Working Voltage=75V, Category="Chip SMD Resistors", ComponentLink1Description=https://datasheet.ciiva.com:443/pdfs/VipMasterIC/IC/VISH/VISH-S-A0007266705/VISH-S-A0007266705-1.pdf?src-supplier=IHS+Markit, ComponentLink1URL=https://datasheet.ciiva.com:443/pdfs/VipMasterIC/IC/VISH/VISH-S-A0007266705/VISH-S-A0007266705-1.pdf?src-supplier=IHS+Markit, ComponentLink2Description=https://datasheet.ciiva.com/11809/0900766b80d98afc-11809944.pdf?src-supplier=Rs, ComponentLink2URL=https://datasheet.ciiva.com/11809/0900766b80d98afc-11809944.pdf?src-supplier=Rs, ComponentLink3Description=https://datasheet.ciiva.com/2466/dcrcwe3-2466029.pdf?src-supplier=Digikey, ComponentLink3URL=https://datasheet.ciiva.com/2466/dcrcwe3-2466029.pdf?src-supplier=Digikey, ComponentLink4Description=https://datasheet.ciiva.com/2466/dcrcwe3-2466030.pdf?src-supplier=Digikey, ComponentLink4URL=https://datasheet.ciiva.com/2466/dcrcwe3-2466030.pdf?src-supplier=Digikey, ComponentLink5Description=https://datasheet.ciiva.com/2466/dcrcwe3-2466031.pdf?src-supplier=Digikey, ComponentLink5URL=https://datasheet.ciiva.com/2466/dcrcwe3-2466031.pdf?src-supplier=Digikey, ComponentLink6Description=https://datasheet.ciiva.com/3257/dcrcwe3-3257528.pdf?src-supplier=Avnet, ComponentLink6URL=https://datasheet.ciiva.com/3257/dcrcwe3-3257528.pdf?src-supplier=Avnet, ComponentLink7Description=https://datasheet.ciiva.com/3257/dcrcwe3-3257529.pdf?src-supplier=Avnet, ComponentLink7URL=https://datasheet.ciiva.com/3257/dcrcwe3-3257529.pdf?src-supplier=Avnet, ComponentLink8Description=https://datasheet.ciiva.com/5545/dcrcwe3-109170-5545849.pdf?src-supplier=Mouser, ComponentLink8URL=https://datasheet.ciiva.com/5545/dcrcwe3-109170-5545849.pdf?src-supplier=Mouser, ComponentLink9Description=https://datasheet.ciiva.com/16767/70201119-16767917.pdf?src-supplier=Allied+Electronics, ComponentLink9URL=https://datasheet.ciiva.com/16767/70201119-16767917.pdf?src-supplier=Allied+Electronics, ComponentLink10Description=https://datasheet.ciiva.com/16778/70201119-16778734.pdf?src-supplier=Allied+Electronics, ComponentLink10URL=https://datasheet.ciiva.com/16778/70201119-16778734.pdf?src-supplier=Allied+Electronics, ComponentLink11Description=https://datasheet.ciiva.com/7690/1697337-7690717.pdf?src-supplier=Element14, ComponentLink11URL=https://datasheet.ciiva.com/7690/1697337-7690717.pdf?src-supplier=Element14, ComponentLink12Description=https://datasheet.ciiva.com/7690/1720486-7690863.pdf?src-supplier=Element14, ComponentLink12URL=https://datasheet.ciiva.com/7690/1720486-7690863.pdf?src-supplier=Element14, Construction=Chip, JESD-609 Code=e3, Manufacturer Part Number=CRCW06033K00FKEA, Mounting Technology="Surface Mount", Packaging="Tape and Reel", Pins=2, Pricing="5000=0.00112 (USD)", Reach SVHC Compliant=Yes, Reference Standard=AEC-Q200, RoHS=Yes, RoHS Compliant=Yes, Stock=1745000, Supplier=Avnet, Supplier Part Number=CRCW06033K00FKEA, Technology="METAL GLAZE/THICK FILM", Terminal Finish=Nickel, Termination=Wraparound
R? R? R? R?: "Metal Glaze/thick Film, 0.1W, 0ohm, Surface Mount, 0603", Case/Package=0603, Manufacturer=Yageo, Max Operating Temperature=155°C, Min Operating Temperature=-55°C, Package Height=0.45mm, Package Length=1.6mm, Package Shape=Rectangular, Package Style=SMTMeter, Package Width=0.8mm, Power=100mW, Rated Temperature=70°C, Resistor Type="FIXED RESISTOR", Supplier Part Number=3992146, Category="Chip SMD Resistors", ComponentLink1Description=https://datasheet.ciiva.com:443/pdfs/VipMasterIC/IC/YAGO/YAGO-S-A0008145938/YAGO-S-A0008145938-1.pdf?src-supplier=IHS+Markit, ComponentLink1URL=https://datasheet.ciiva.com:443/pdfs/VipMasterIC/IC/YAGO/YAGO-S-A0008145938/YAGO-S-A0008145938-1.pdf?src-supplier=IHS+Markit, ComponentLink2Description=https://datasheet.ciiva.com/11808/pyu-r-int-6-11808700.pdf?src-supplier=Rs, ComponentLink2URL=https://datasheet.ciiva.com/11808/pyu-r-int-6-11808700.pdf?src-supplier=Rs, ComponentLink3Description=https://datasheet.ciiva.com/22747/443971-22747530.pdf?src-supplier=Element14, ComponentLink3URL=https://datasheet.ciiva.com/22747/443971-22747530.pdf?src-supplier=Element14, ComponentLink4Description=https://datasheet.ciiva.com/12555/rc0603-272842-12555254.pdf?src-supplier=Mouser, ComponentLink4URL=https://datasheet.ciiva.com/12555/rc0603-272842-12555254.pdf?src-supplier=Mouser, ComponentLink5Description=https://datasheet.ciiva.com/7746/1738695-7746421.pdf?src-supplier=Element14, ComponentLink5URL=https://datasheet.ciiva.com/7746/1738695-7746421.pdf?src-supplier=Element14, ComponentLink6Description=https://datasheet.ciiva.com/7746/1738695-7746422.pdf?src-supplier=Element14, ComponentLink6URL=https://datasheet.ciiva.com/7746/1738695-7746422.pdf?src-supplier=Element14, ComponentLink7Description=https://datasheet.ciiva.com/8883/pyu-rc0603-51-rohs-l-4-8883045.pdf?src-supplier=Avnet, ComponentLink7URL=https://datasheet.ciiva.com/8883/pyu-rc0603-51-rohs-l-4-8883045.pdf?src-supplier=Avnet, ComponentLink8Description=https://datasheet.ciiva.com/15189/getdatasheetpartid-329462-15189845.pdf?src-supplier=Verical, ComponentLink8URL=https://datasheet.ciiva.com/15189/getdatasheetpartid-329462-15189845.pdf?src-supplier=Verical, Construction=Chip, JESD-609 Code=e3, Manufacturer Part Number=RC0603JR-070RL, Mounting Technology="Surface Mount", Packaging="Tape and Reel", Pins=2, Pricing="5000=0.0015, 50000=0.0014, 150000=0.0014, 375000=0.0013, 1000000=0.0012 (USD)", Reach SVHC Compliant=Yes, RoHS=Yes, RoHS Compliant=Yes, Stock=21660000, Supplier="Future Electronics", Technology="METAL GLAZE/THICK FILM", Terminal Finish=Nickel, Termination=Wraparound
R?: library part CMP-2000-04031-1, Manufacturer=Yageo, Part Number=RC0603FR-07383RL
R?: library part CMP-2000-04254-1, Manufacturer=Yageo, Part Number=RC0603JR-0720RL
R? R?: "RES 5K OHM 0.1% 1/10W 0603", Case=0603, Manufacturer=Yageo, Supplier Part Number=13-RT0603BRE075KLCT-ND, Category="Chip SMD Resistors", ComponentLink1Description=http://www.yageo.com/documents/recent/PYu-RT_1-to-0.01_RoHS_L_9.pdf?src-supplier=Digikey, ComponentLink1URL=http://www.yageo.com/documents/recent/PYu-RT_1-to-0.01_RoHS_L_9.pdf?src-supplier=Digikey, ComponentLink2Description=https://datasheet.octopart.com/RT0603BRE075KL-Yageo-datasheet-169971040.pdf?src-supplier=Future+Electronics, ComponentLink2URL=https://datasheet.octopart.com/RT0603BRE075KL-Yageo-datasheet-169971040.pdf?src-supplier=Future+Electronics, ComponentLink3Description=https://datasheet.octopart.com/RT0603BRE075KL-Yageo-datasheet-176402239.pdf?src-supplier=Newark, ComponentLink3URL=https://datasheet.octopart.com/RT0603BRE075KL-Yageo-datasheet-176402239.pdf?src-supplier=Newark, Manufacturer Part Number=RT0603BRE075KL, Pricing="1=0.17, 10=0.133, 50=0.103, 100=0.0918, 500=0.07038, 1000=0.06222 (USD)", RoHS=Yes, Stock=53182, Supplier=Digikey